# Altium PCB AIL_TSAL_PCB.PcbDoc
Units mm, origin at the board's own origin, x right, y up, seen from the top; angles counter-clockwise.
Board outline 30 x 60 mm, 2 copper layers (Top Layer, Bottom Layer); 11 components, 10 nets, 34 pads, 3 vias.
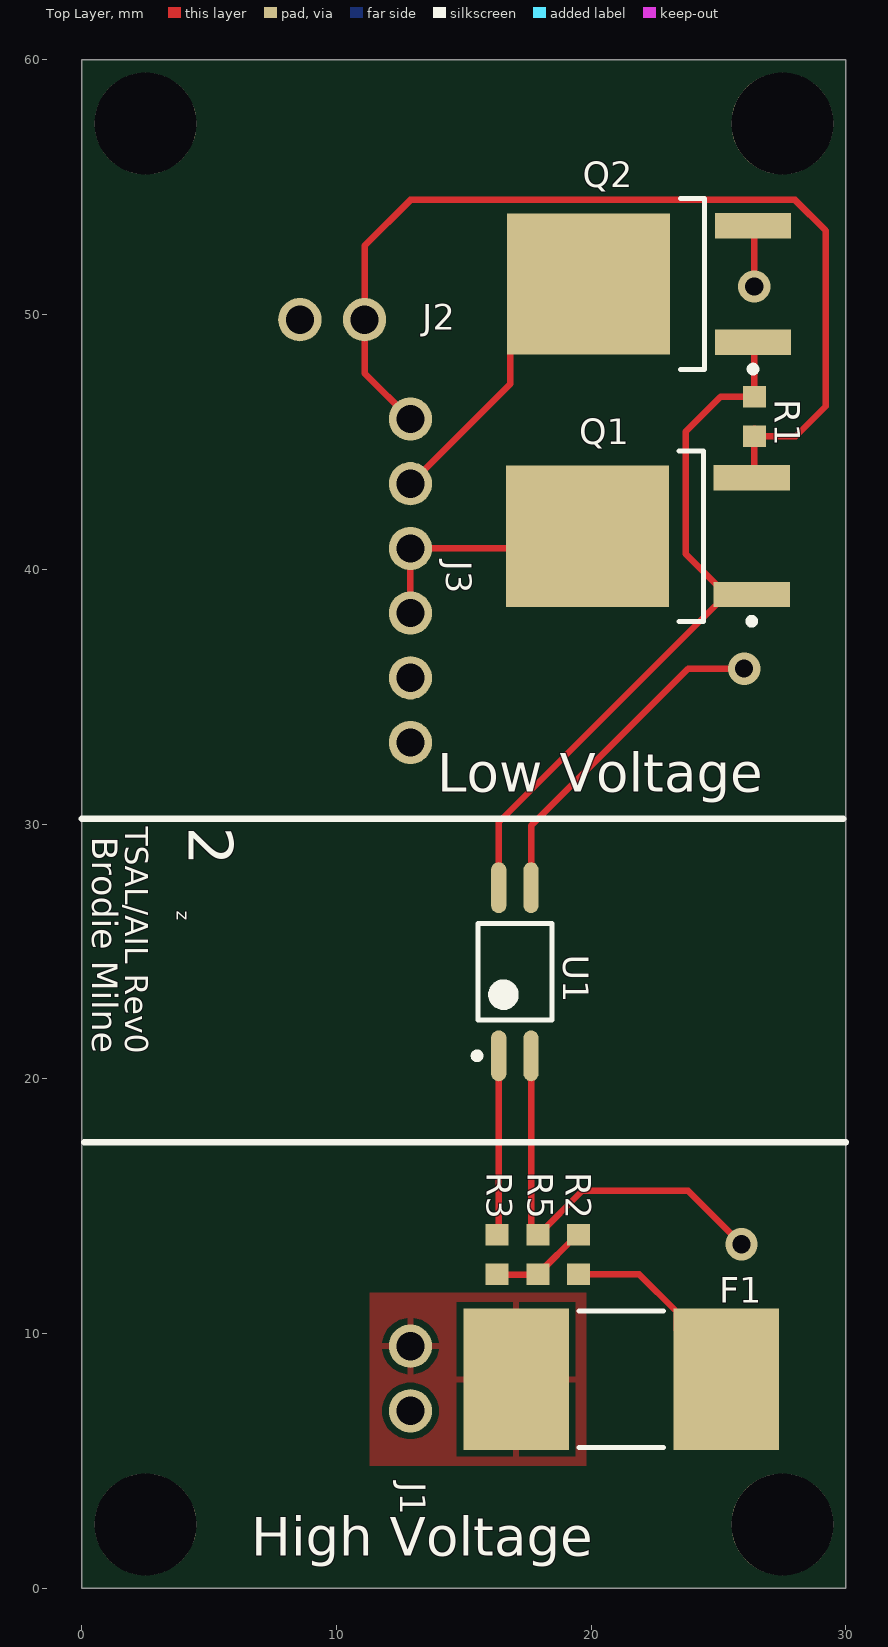
[diagram p0: Top Layer view]
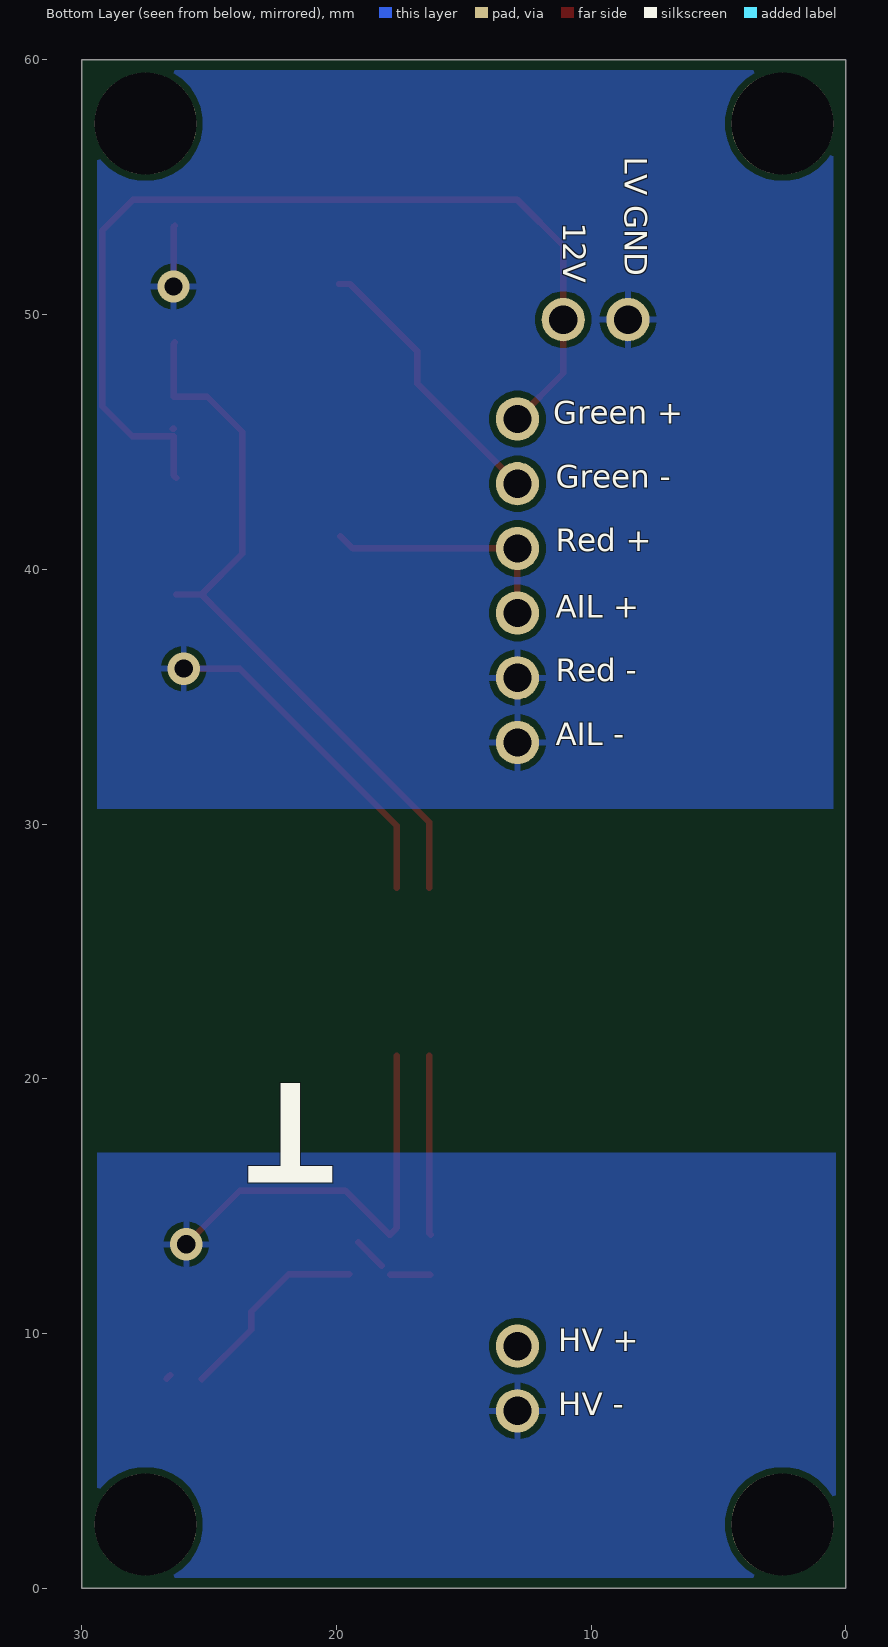
[diagram p1: Bottom Layer view, seen from below]
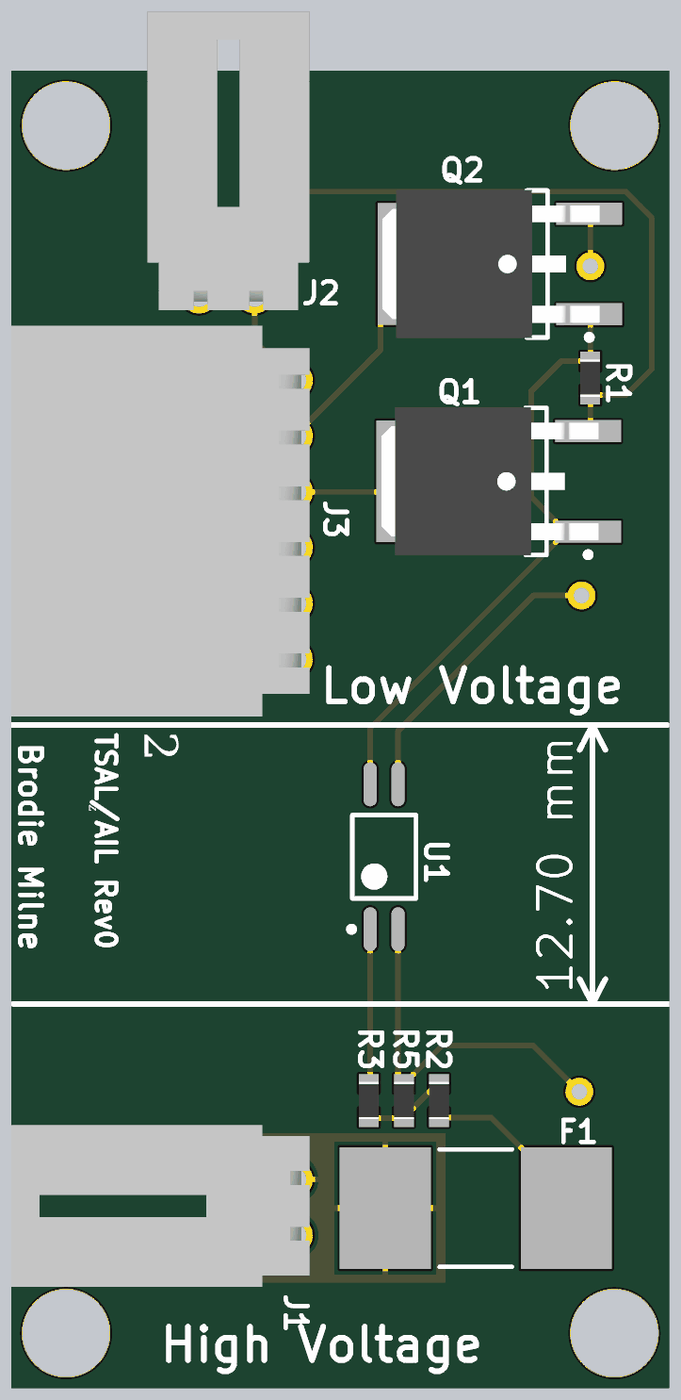
[diagram p2: 3D render of the assembled board from above, using the file's embedded part models]

## Layer stack, top to bottom
Top Solder: solder mask 0.0102, Solder Resist, Dk 3.5
Top Layer: signal copper 0.0356
Dielectric 1: dielectric 0.32, FR-4, Dk 4.8
Bottom Layer: signal copper 0.0356
Bottom Solder: solder mask 0.0102, Solder Resist, Dk 3.5

## Board outline
0,60 0,0 30,0 30,60

## Design rules (kind name [scope] priority, off if disabled: settings)
Clearance [All] p1: gap=0.254 ignorepadtopadclearanceinfootprint=FALSE except(0: Arc-Hole Track-Hole SMDPad-Hole THPad-Hole Via-Hole Fill-Hole Poly-Hole Region-Hole Text-Hole)
PolygonConnect [All] p1: connectstyle=Relief reliefconductorwidth=0.254 reliefentries=4 polygonreliefangle="90 Angle" airgapwidth=0.254
RoutingVias [All] p1: holewidth=0.6 width=0.8 viastyle="Through Hole" minholewidth=0.4 minwidth=0.6 maxholewidth=0.711 maxwidth=1.27
SolderMaskExpansion [All] p1: expansion=0.102 istentingtop=FALSE
Width [All] p1: maxlimit=2 minlimit=0.254 preferedwidth=0.254 minimp=50.000000 maximp=50.000000 favimp=50.000000
30 further rules are at their usual default settings.

## Components (designator, comment, footprint, x,y, rotation, side; value= is the part's Value field where it differs from the comment)
F1 "Fuse 450V - 5A" Fuse-11.2x5.05 21.175,8.2 r0 top
J1 "HV" 2PIN 12.9,9.5 r270 top
J2 "LV" 2PIN 11.1,49.8 r180 top
J3 "Lights Out" 6PIN 12.9,45.9 r270 top
Q1 "NTD2955T4GOSCT-ND" DPAK-TO252 22.2,41.3 r180 top
Q2 "IPD50N06S4L12ATMA2CT-ND" DPAK-TO252 22.25,51.2 r180 top
R1 "560R" RES-0603 26.4,46 r270 top
R2 "39K" RES-0603 19.5,13.1 r270 top
R3 "430R" RES-0603 16.3,13.1 r90 top
R5 "1K" RES-0603 17.9,13.1 r270 top
U1 "EL3H7(B)(TA)-VG" SOIC127P700X200-4N 17,24.2 r90 top

## Footprints (in the part's own frame and the unit in brackets; to place one, negate y for a bottom-side part, rotate by r counter-clockwise, add the part's x,y. Pads: shape width x height; smd on the part's side, far side on the other; paste and mask are expansions set on the pad)
2PIN [mm]
  round 1.7 hole 1.11: 1(0,0) 2(2.54,0)
  body extent -2.48,-12.89 4.88,0.7, height 7.06
6PIN [mm]
  round 1.7 hole 1.11: 1(0,0) 2(2.54,0) 3(5.08,0) 4(7.62,0) 5(10.16,0) 6(12.7,0)
  body extent -2.48,-12.89 15.3,0.7, height 7.06
DPAK-TO252 [mm] "D-PAK, 3-Pads, Body 6.20x6.73mm (max), IPC Medium Density"
  rect 3x1 smd: 1(-4.1,2.29) 3(-4.1,-2.29)
  rect 6.4x5.55 smd: 2(2.35,0)
  silkscreen extent -4.23,-3.35 -1.25,3.46, body extent -4.57,-3.37 5.33,3.37, height 2.38
Fuse-11.2x5.05 [mm] "Fuse, 2-Leads, Body 11.20x5.05mm, IPC Medium Density"
  rect 4.15x5.55 smd: 1(-4.125,0) 2(4.125,0)
  silkscreen extent -1.65,-2.67 1.65,2.68, body extent -5.85,-2.77 5.85,2.78, height 5.05
RES-0603 [mm] "Chip Resistor, 2-Leads, Body 1.60x0.80mm, IPC Medium Density"
  rect 0.85x0.9 smd: 1(-0.775,0) 2(0.775,0)
  body extent -0.85,-0.45 0.85,0.45, height 0.55
SOIC127P700X200-4N [mm] "SOIC, 4-Leads, Body 2.70x4.40mm, Pitch 1.27mm, IPC Medium Density"
  oval 2x0.6 smd: 1(-3.3,0.635) 2(-3.3,-0.635) 3(3.3,-0.635) 4(3.3,0.635)
  silkscreen extent -3.42,-1.45 1.9,1.61, body extent -2.3,-1.45 2.3,1.45, height 2

## Part data
F1: "FUSE 500VDC 350VAC SMT 5A", Supplier 1=DigiKey
J1 J2: library part 2PIN, "CONN HEADER R/A 2POS 2.54MM", Color=Black, Contact Resistance=30mR, Manufacturer=Molex, Manufacturer Part Number=0705530106, Max Operating Temperature=105°C, Min Operating Temperature=-40°C, Supplier Part Number 1=WM4153-ND, ComponentLink1Description=http://www.molex.com/webdocs/datasheets/pdf/en-us/0705530106_PCB_HEADERS.pdf?src-supplier=Avnet+Asia, ComponentLink1URL=http://www.molex.com/webdocs/datasheets/pdf/en-us/0705530106_PCB_HEADERS.pdf?src-supplier=Avnet+Asia, ComponentLink2Description=https://www.molex.com/pdm_docs/ps/PS-70400.pdf?src-supplier=Digi-Key, ComponentLink2URL=https://www.molex.com/pdm_docs/ps/PS-70400.pdf?src-supplier=Digi-Key, Connector Type="Male Pin", Contact Material=Bronze, Contact Mating Length=0.24inch, Contact Plating=Gold, Depth=13.59mm, Housing Color=Black, Housing Material=Polyester, Length=7.37mm, Mount="Through Hole", Number of Contacts=2, Number of Positions=2, Number of Rows=1, Orientation="Right Angle", Packaging=Rail/Tube, Pitch=2.54mm, Pricing 1="1=1.38, 10=1.25, 100=1.071, 500=0.8925, 1000=0.765, 5000=0.6783, 10000=0.663 (USD)", Stock 1=2224, Supplier 1=Digi-Key, Termination=Solder
J3: library part 6PIN, "CONN HEADER R/A 6POS 2.54MM", Color=Black, Contact Resistance=30mR, Current Rating=3A, Flammability Rating="UL94 V-0", Insulation Resistance=1GR, Manufacturer=Molex, Manufacturer Part Number=70553-0040, Max Operating Temperature=105°C, Max Voltage Rating (AC)=250V, Min Operating Temperature=-40°C, Package Quantity=1200, Supplier Part Number 1=WM4928-ND, ComponentLink1Description=http://uk.rs-online.com/webdocs/13c4/0900766b813c4993.pdf?src-supplier=RSComponents, ComponentLink1URL=http://uk.rs-online.com/webdocs/13c4/0900766b813c4993.pdf?src-supplier=RSComponents, ComponentLink2Description=http://www.molex.com/webdocs/datasheets/pdf/en-us/0705530040_PCB_HEADERS.pdf?src-supplier=Avnet+Europe, ComponentLink2URL=http://www.molex.com/webdocs/datasheets/pdf/en-us/0705530040_PCB_HEADERS.pdf?src-supplier=Avnet+Europe, ComponentLink3Description=http://www.farnell.com/datasheets/1844551.pdf?src-supplier=Farnell, ComponentLink3URL=http://www.farnell.com/datasheets/1844551.pdf?src-supplier=Farnell, ComponentLink4Description=http://www.mouser.com/ds/2/276/0705530040_PCB_HEADERS-172948.pdf?src-supplier=Mouser, ComponentLink4URL=http://www.mouser.com/ds/2/276/0705530040_PCB_HEADERS-172948.pdf?src-supplier=Mouser, ComponentLink5Description=http://www.farnell.com/cad/655744.pdf?src-supplier=Element14, ComponentLink5URL=http://www.farnell.com/cad/655744.pdf?src-supplier=Element14, ComponentLink6Description=http://www.jameco.com/Jameco/Products/ProdDS/1302975.pdf?src-supplier=Jameco, ComponentLink6URL=http://www.jameco.com/Jameco/Products/ProdDS/1302975.pdf?src-supplier=Jameco, Contact Material="Bronze,Copper Alloy,Brass", Contact Plating=Tin, Depth=13.59mm, ELV=Compliant, Gender=Male, Glow Wire Compliant=Non-compliant, Height=6.99mm, Housing Color=Black, Housing Material=Thermoplastic, Lead Free="Lead Free", Length=17.79mm, Material=Brass, Max Current Rating=3A, Mount="Through Hole", Number of Circuits=6, Number of Contacts=6, Number of Positions=6, Number of Rows=1, Orientation="Right Angle", Packaging=Rail/Tube, Pitch=2.54mm, Pricing 1="1=1.58, 10=1.434, 100=1.2289, 500=1.0241, 1000=0.8778, 5000=0.77832, 10000=0.76076 (USD)", Radiation Hardening=No, REACH SVHC=Unknown, Stock 1=2212, Supplier 1=Digi-Key, Termination=Solder, Voltage Rating=250V, Voltage Rating (DC)=250V
Q1: library part P-FET-60V-12A, "MOSFET P-CH 60V 12A DPAK", Case/Package=DPAK, Continuous Drain Current (ID)=12A, Current Rating=-12A, Drain to Source Breakdown Voltage=-60V, Drain to Source Resistance=155mR, Gate to Source Voltage (Vgs)=20V, Input Capacitance=750pF, Manufacturer="ON Semiconductor", Manufacturer Part Number=NTD2955T4G, Max Operating Temperature=175°C, Max Power Dissipation=55W, Min Operating Temperature=-55°C, On-State Resistance=180mR, Package Quantity=1, Supplier Part Number 1=NTD2955T4GOSDKR-ND, Threshold Voltage=-2.8V, ComponentLink1Description=http://www.onsemi.com/pub/Collateral/NTD2955-D.PDF?src-supplier=Avnet, ComponentLink1URL=http://www.onsemi.com/pub/Collateral/NTD2955-D.PDF?src-supplier=Avnet, ComponentLink2Description=http://www.onsemi.com/pub/Collateral/NTD2955-D.PDF?src-supplier=Avnet+Europe, ComponentLink2URL=http://www.onsemi.com/pub/Collateral/NTD2955-D.PDF?src-supplier=Avnet+Europe, ComponentLink3Description=http://www.onsemi.com/pub_link/Collateral/NTD2955-D.PDF?src-supplier=Element14, ComponentLink3URL=http://www.onsemi.com/pub_link/Collateral/NTD2955-D.PDF?src-supplier=Element14, ComponentLink4Description=http://www.onsemi.com/pub/Collateral/NTD2955-D.PDF?src-supplier=Digi-Key, ComponentLink4URL=http://www.onsemi.com/pub/Collateral/NTD2955-D.PDF?src-supplier=Digi-Key, ComponentLink5Description=http://www.jameco.com/Jameco/Products/ProdDS/1178118.pdf?src-supplier=Jameco, ComponentLink5URL=http://www.jameco.com/Jameco/Products/ProdDS/1178118.pdf?src-supplier=Jameco, Contact Plating=Tin,Matte, Drain to Source Voltage (Vdss)=-60V, Element Configuration=Single, Fall Time=48ns, Height=2.38mm, Lead Free="Lead Free", Length=6.73mm, Nominal Vgs=-2.8V, Number of Channels=1, Number of Elements=1, Number of Pins=3, Packaging="Tape and Reel", Power Dissipation=55W, Pricing 1="1=0.76, 10=0.672, 25=0.6316, 100=0.4583, 250=0.44204, 500=0.38296, 1000=0.32592 (USD)", Radiation Hardening=No, Rds On Max=180mR, REACH SVHC="No SVHC", Rise Time=45ns, Stock 1=9993, Supplier 1=Digi-Key, Turn-Off Delay Time=26ns, Turn-On Delay Time=10ns, Voltage Rating (DC)=-60V, Width=6.22mm
Q2: library part N-FET-60V-50A, "MOSFET N-CH 60V 50A TO252-3", Case/Package=TO-252-3, Continuous Drain Current (ID)=50A, Drain to Source Voltage (Vdss)=60V, Gate to Source Voltage (Vgs)=16V, Input Capacitance=2.89nF, Manufacturer=Infineon, Manufacturer Part Number=IPD50N06S4L12ATMA2, Max Operating Temperature=175°C, Max Power Dissipation=50W, Min Operating Temperature=-55°C, Supplier Part Number 1=IPD50N06S4L12ATMA2DKR-ND, Fall Time=5ns, Max Dual Supply Voltage=60V, Mount="Surface Mount", Number of Pins=3, Packaging="Tape and Reel", Pricing 1="1=0.92, 10=0.806, 25=0.7572, 100=0.5497, 250=0.53012, 500=0.45928, 1000=0.39088 (USD)", Rds On Max=12mR, Rise Time=2ns, Stock 1=3187, Supplier 1=Digi-Key, Turn-Off Delay Time=25ns, Turn-On Delay Time=6ns
R1: library part "0603 - 560R", "RES 560 OHM 1% 1/10W 0603", Supplier 1=Digi-Key
R2: library part 0603-39KR, "RES SMD 39K OHM 1% 1/10W", Case Code (Imperial)=0603, Case Code (Metric)=1608, Manufacturer="TE Connectivity", Manufacturer Part Number=CRGCQ0603F39K, Max Operating Temperature=155°C, Max Power Dissipation=100mW, Min Operating Temperature=-55°C, Resistance=39kR, Supplier Part Number 1=A129707DKR-ND, Temperature Coefficient=100ppm/°C, Tolerance=1%, Case/Package=0603, ComponentLink1Description=https://4donline.ihs.com/images/VipMasterIC/IC/TYEL/TYEL-S-A0004929575/TYEL-S-A0004929575-1.pdf?hkey=52A5661711E402568146F3353EA87419&src-supplier=Newark, ComponentLink1URL=https://4donline.ihs.com/images/VipMasterIC/IC/TYEL/TYEL-S-A0004929575/TYEL-S-A0004929575-1.pdf?hkey=52A5661711E402568146F3353EA87419&src-supplier=Newark, ComponentLink2Description=https://4donline.ihs.com/images/VipMasterIC/IC/TYEL/TYEL-S-A0004929575/TYEL-S-A0004929575-1.pdf?hkey=52A5661711E402568146F3353EA87419&src-supplier=Farnell, ComponentLink2URL=https://4donline.ihs.com/images/VipMasterIC/IC/TYEL/TYEL-S-A0004929575/TYEL-S-A0004929575-1.pdf?hkey=52A5661711E402568146F3353EA87419&src-supplier=Farnell, ComponentLink3Description=https://www.te.com/commerce/DocumentDelivery/DDEController?Action=srchrtrv&DocNm=1773204-3&DocType=DS&DocLang=English&src-supplier=Digi-Key, ComponentLink3URL=https://www.te.com/commerce/DocumentDelivery/DDEController?Action=srchrtrv&DocNm=1773204-3&DocType=DS&DocLang=English&src-supplier=Digi-Key, ComponentLink4Description=https://www.te.com/commerce/DocumentDelivery/DDEController?Action=srchrtrv&amp;DocNm=1773204-3&amp;DocType=DS&amp;DocLang=English&src-supplier=Digi-Key, ComponentLink4URL=https://www.te.com/commerce/DocumentDelivery/DDEController?Action=srchrtrv&amp;DocNm=1773204-3&amp;DocType=DS&amp;DocLang=English&src-supplier=Digi-Key, Composition="Thick Film", Features="Moisture Resistant,Automotive AEC-Q200", Number of Terminations=2, Packaging="Tape and Reel", Pricing 1="1=0.1, 10=0.03, 100=0.012, 1000=0.00541, 2500=0.00469 (USD)", Stock 1=57588, Supplier 1=Digi-Key
R3: library part "0603 - 430R", "RES 430 OHM 1% 1/10W 0603", Supplier 1=Digi-Key
R5: library part 0603-1KR, "RES SMD 1K OHM 1% 1/10W 0603", Case Code (Imperial)=0603, Case Code (Metric)=1608, Manufacturer="Vishay Dale", Manufacturer Part Number=CRCW06031K00FKEA, Max Operating Temperature=155°C, Max Power Dissipation=100mW, Min Operating Temperature=-55°C, Package Quantity=10, Resistance=1kR, Supplier Part Number 1=541-1.00KHCT-ND, Temperature Coefficient=100ppm/°C, Tolerance=1%, Voltage Rating=75V, Case/Package=0603, ComponentLink1Description=http://www.vishay.com/docs/20035/dcrcwe3.pdf?src-supplier=Digi-Key, ComponentLink1URL=http://www.vishay.com/docs/20035/dcrcwe3.pdf?src-supplier=Digi-Key, ComponentLink2Description=http://uk.rs-online.com/webdocs/0d98/0900766b80d98afc.pdf?src-supplier=RSComponents, ComponentLink2URL=http://uk.rs-online.com/webdocs/0d98/0900766b80d98afc.pdf?src-supplier=RSComponents, ComponentLink3Description=http://www.vishay.com/docs/20035/dcrcwe3.pdf?src-supplier=Avnet, ComponentLink3URL=http://www.vishay.com/docs/20035/dcrcwe3.pdf?src-supplier=Avnet, ComponentLink4Description=http://www.vishay.com/docs/20035/dcrcwe3.pdf?src-supplier=Avnet+Asia, ComponentLink4URL=http://www.vishay.com/docs/20035/dcrcwe3.pdf?src-supplier=Avnet+Asia, ComponentLink5Description=http://www.farnell.com/datasheets/2310790.pdf?src-supplier=Element14, ComponentLink5URL=http://www.farnell.com/datasheets/2310790.pdf?src-supplier=Element14, ComponentLink6Description=https://www.distrelec.biz/Web/Downloads/a_/en/flD-CRCW-e3_data_en.pdf?mime=application%2Fpdf&src-supplier=Distrelec, ComponentLink6URL=https://www.distrelec.biz/Web/Downloads/a_/en/flD-CRCW-e3_data_en.pdf?mime=application%2Fpdf&src-supplier=Distrelec, ComponentLink7Description=http://www.vishay.com/docs/20035/dcrcwe3.pdf?src-supplier=Future+Electronics, ComponentLink7URL=http://www.vishay.com/docs/20035/dcrcwe3.pdf?src-supplier=Future+Electronics, ComponentLink8Description=http://www.vishay.com/docs/20035/dcrcwe3.pdf?src-supplier=Avnet+Europe, ComponentLink8URL=http://www.vishay.com/docs/20035/dcrcwe3.pdf?src-supplier=Avnet+Europe, Composition="Thick Film", Contact Plating=Tin, Depth=0.85mm, Features="Automotive AEC-Q200", Height=0.45mm, Lead Free="Lead Free", Length=1.55mm, Military Standard=Not, Mount="Surface Mount", Number of Pins=2, Number of Terminations=2, Packaging="Tape and Reel", Power Rating=100mW, Pricing 1="1=0.1, 10=0.034, 100=0.0139, 1000=0.00623, 2500=0.0054 (USD)", Radiation Hardening=No, REACH SVHC=Unknown, Stock 1=671453, Supplier 1=Digi-Key, Termination=SMD/SMT, Voltage Rating (DC)=75V, Weight=7.1E-05oz, Width=0.033inch
U1: "OPTOISOLATOR 3.75KV TRANS 4-SSOP", Case/Package=SSOP, Collector Emitter Breakdown Voltage=80V, Collector Emitter Saturation Voltage=200mV, Current Transfer Ratio=260%, Forward Current=50mA, Forward Voltage=1.4V, Isolation Voltage=3.75kV, Manufacturer=Everlight, Max Operating Temperature=125°C, Max Power Dissipation=200mW, Min Operating Temperature=-55°C, Package Quantity=1, Reverse Breakdown Voltage=6V, Supplier Part Number 1=1080-1197-6-ND, Approvals=UL, Collector Emitter Voltage (VCEO)=80V, ComponentLink1Description=https://everlightamericas.com/index.php?controller=attachment&id_attachment=2584&src-supplier=Digi-Key, ComponentLink1URL=https://everlightamericas.com/index.php?controller=attachment&id_attachment=2584&src-supplier=Digi-Key, ComponentLink2Description=https://everlightamericas.com/index.php?controller=attachment&amp;id_attachment=2584&src-supplier=Digi-Key, ComponentLink2URL=https://everlightamericas.com/index.php?controller=attachment&amp;id_attachment=2584&src-supplier=Digi-Key, ComponentLink3Description=https://www.verical.com/server-webapp/html/getDatasheet?partID=416716&src-supplier=Verical, ComponentLink3URL=https://www.verical.com/server-webapp/html/getDatasheet?partID=416716&src-supplier=Verical, Fall Time=18000ns, Lead Free="Lead Free", Manufacturer Part Number=EL3H7(B)(TA)-VG, Max Collector Current=50mA, Max Input Current=50mA, Max Output Voltage=80V, Mount="Surface Mount", Number of Channels=1, Number of Elements=1, Number of Pins=4, Output Current per Channel=50mA, Packaging="Tape and Reel", Power Dissipation=200mW, Pricing 1="1=0.42, 10=0.304, 25=0.248, 100=0.1985, 250=0.16752, 500=0.1427, 1000=0.11167, 2500=0.10237 (USD)", Radiation Hardening=No, Rise Time=18000ns, Stock 1=119652, Supplier 1=Digi-Key

## Free pads (board coordinates)
  round 4 hole 4: 1(2.5,2.5) 2(2.5,57.5) 2(27.5,2.5) 2(27.5,57.5)

## Via types
v1: diameter 1.27, hole 0.711, Top Layer to Bottom Layer, 3 vias

## Nets (pads, with @x,y where several pads share a name; then routed paths per layer and width w, separated by ;. In a path a pad name is that pad's centre, name@x,y a point inside that pad or via, vN(x,y) a via of type N, cw(c..) or ccw(c..) an arc to the next point about the centre after c; other vN are vias at no path point)
12V: J2.1 J3.1 Q1.3 R1.2 | length 38.8
  Top Layer w0.254: J3.1 11.1,47.7 J2.1 11.1,52.7 12.9,54.5 28,54.5 29.2,53.3 29.2,46.4 28.025,45.225 R1.2 26.4,43.69 Q1.3 ; R1.2@26.4,45.525 R1.2@26.425,45.525
Anode: R3.2 U1.1 | length 7.1
  Top Layer w0.254: R3.2 16.365,13.94 U1.1
Collector: Q1.1 Q2.1 R1.1 U1.4 | length 28.7
  Top Layer w0.254: U1.4 16.365,30.065 24.927,38.627 24.927,38.637 Q1.1@25.3,39.01 ; Q1.1 Q1.1@25.3,39.01 ; Q2.1 26.4,48.86 R1.1 25.075,46.775 23.7,45.4 23.7,40.61 Q1.1@25.3,39.01
"HV Active": J3.3 J3.4 Q1.2 | length 9.7
  Top Layer w0.254: J3.4 J3.3 19.37,40.82 Q1.2
"HV GND": J1.2 R5.1 U1.2 | length 16.7
  Top Layer w0.254: U1.2 17.635,14.14 R5.1 17.925,13.875 19.65,15.6 23.8,15.6 v1(25.9,13.5)
HV+: F1.1 J1.1
Input: R2.1 R3.1 R5.2 | length 2.9
  Top Layer w0.254: R3.1@16.325,12.3 R5.2@17.9,12.3 ; R5.2@18.223,12.648 R2.1@19.152,13.577
"LV Active": J3.2 Q2.2 | length 11
  Top Layer w0.254: J3.2 16.827,47.287 16.827,48.552 19.475,51.2 Q2.2
"LV GND": J2.2 J3.5 J3.6 Q2.3 U1.3 | length 15.8
  Top Layer w0.254: U1.3 17.635,29.935 23.8,36.1 v1(26,36.1) ; Q2.3 26.4,53.44 v1(26.4,51.1)
Rin: F1.2 R2.2 | length 8.1
  Top Layer w0.254: R2.2 21.875,12.325 23.352,10.848 23.352,10.148 F1.2 ; F1.2@26.538,8.363 F1.2@26.675,8.225

## Polygon pours and split planes (outlines as drawn)
"HV GND" on Bottom Layer "HV_GND_L02_P005" (solid, pour order 5): 0.4,17.1 0.4,0.4 29.4,0.4 29.4,17.1
"LV GND" on Bottom Layer "LV_GND_L02_P003" (solid, pour order 3): 0.5,59.6 0.5,30.6 29.4,30.6 29.4,59.6
HV+ on Top Layer "HV+_L01_P009" (solid, pour order 9): 11.3,11.6 11.3,4.8 19.8,4.8 19.8,11.6

## Silkscreen, mask and mechanical layers (free items; w line width, h text height)
Top Overlay:
  lines w0.254: 0,30.2 29.9,30.2 ; 0.1,17.5 30,17.5
  text "Low Voltage" at 13.954,31.262 h1.52
  text "TSAL/AIL Rev0" at 1.7,29.9 h0.9 r270
  text "2" at 3.6,29.9 h3 r270
  text "Brodie Milne" at 0.4,29.5 h1 r270
  text "z" at 3.55,26.599 h0.9 r270
  text "High Voltage" at 6.654,1.262 h1.52
Bottom Overlay:
  text "LV GND" at 8.984,56.2 h1.52 r90
  text "12V" at 11.4,53.6 h1.52 r90
  text "Green +" at 11.5,45.416 h1.52
  text "Green -" at 11.4,42.916 h1.52
  text "Red +" at 11.4,40.416 h1.52
  text "AIL +" at 11.4,37.8 h1.52
  text "Red -" at 11.4,35.316 h1.52
  text "AIL -" at 11.4,32.8 h1.52
  text "1" at 24.428,12.128 h20
  text "HV +" at 11.3,9 h1.52
  text "HV -" at 11.3,6.5 h1.52

## Dimensions
27.5,57.5 to 30,60 on Mechanical 1
27.5,57.5 to 30,60 on Mechanical 1
2.5,57.5 to 0,60 on Mechanical 1
2.5,57.5 to 0,60 on Mechanical 1
27.5,2.5 to 30,0 on Mechanical 1
27.5,2.5 to 30,0 on Mechanical 1
2.5,2.5 to 0,0 on Mechanical 1
2.5,2.5 to 0,0 on Mechanical 1
0,0 to 0,60 on Mechanical 1
0,0 to 30,0 on Mechanical 1
0.1,17.5 to 0,30.2 on Top Overlay